# Altium PCB OneFader_Main.PcbDoc
Units mm, origin at the board's own origin, x right, y up, seen from the top; angles counter-clockwise.
Board outline 60 x 234 mm, 2 copper layers (Top Layer, Bottom Layer); 18 components, 42 nets, 93 pads, 8 vias.
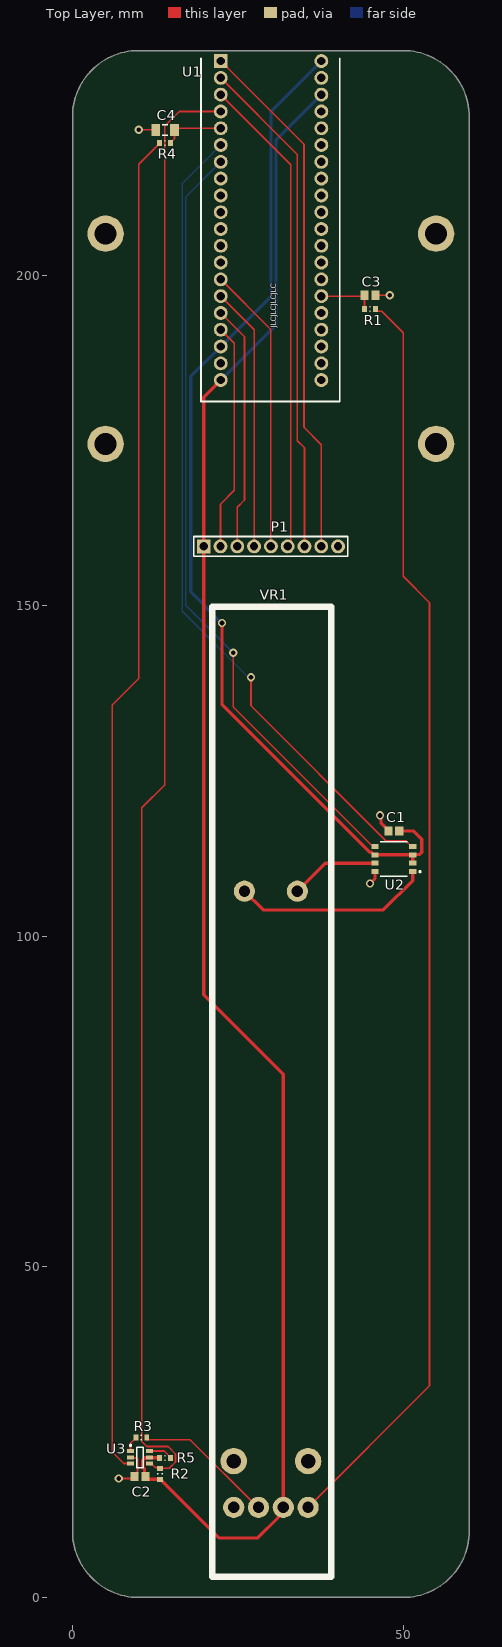
[diagram p0: Top Layer view]
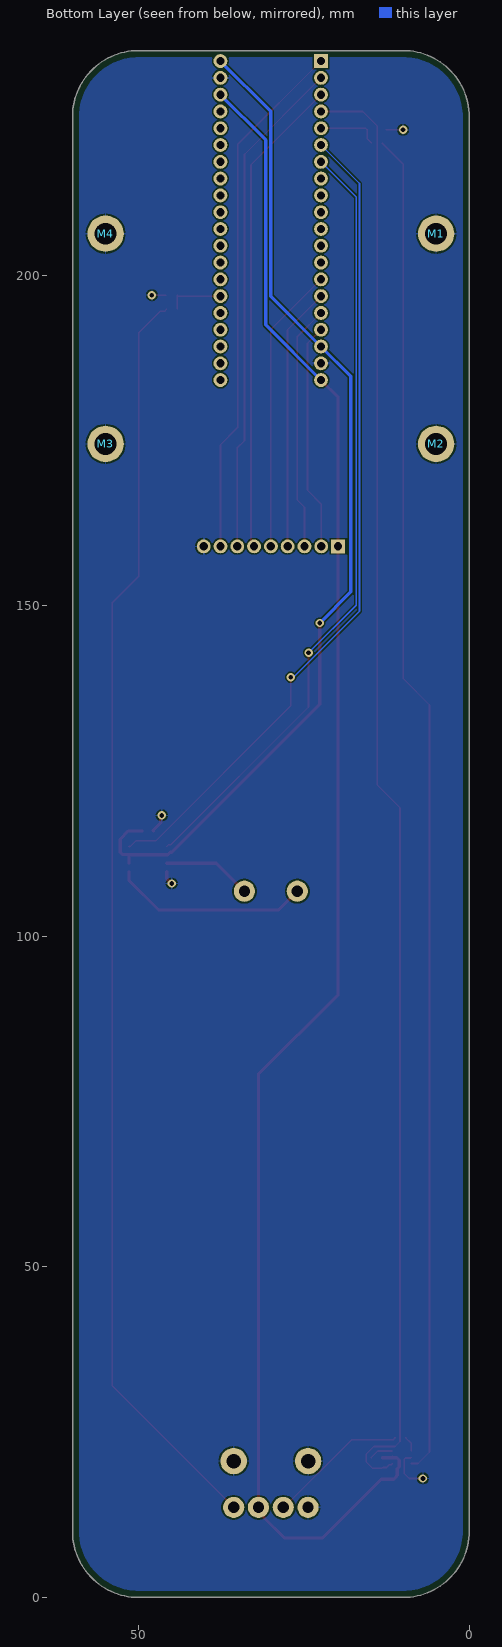
[diagram p1: Bottom Layer view, seen from below]

## Layer stack, top to bottom
Top Solder: solder mask 0.0102, Solder Resist, Dk 3.5
Top Layer: signal copper 0.0356
Dielectric 1: dielectric 0.32, FR-4, Dk 4.8
Bottom Layer: signal copper 0.0356
Bottom Solder: solder mask 0.0102, Solder Resist, Dk 3.5

## Board outline
10,0 50,0 ccw(c50,10) 60,10 60,224 ccw(c50,224) 50,234 10,234 ccw(c10,224) 0,224 0,10 ccw(c10,10)

## Design rules (kind name [scope] priority, off if disabled: settings)
BoardOutlineClearance [All] p1: gap=0.2 ignorepadtopadclearanceinfootprint=FALSE except(1: Fill-OutlineEdge Fill-CavityEdge Fill-CutoutEdge Fill-SplitBarrior Fill-SplitContinuation Poly-OutlineEdge Poly-CavityEdge Poly-CutoutEdge Poly-SplitBarrior Poly-SplitContinuation)
Clearance [All] p1: gap=0.254 ignorepadtopadclearanceinfootprint=FALSE except(0: Arc-Hole Track-Hole SMDPad-Hole THPad-Hole Via-Hole Fill-Hole Poly-Hole Region-Hole Text-Hole)
Height [All] p1: minheight=0 maxheight=50 prefheight=12.7
HoleSize [All] p1: absolutevalues=TRUE maxlimit=5 minlimit=0.025 maxpercent=80.000 minpercent=20.000
MinimumSolderMaskSliver [All] p1: minsoldermaskwidth=0.1
PolygonConnect [All] p1: connectstyle=Relief reliefconductorwidth=0.254 reliefentries=4 polygonreliefangle="90 Angle" airgapwidth=0.254
RoutingVias [All] p1: holewidth=0.711 width=1.27 viastyle="Through Hole" minholewidth=0.711 minwidth=1.27 maxholewidth=0.711 maxwidth=1.27
SolderMaskExpansion [All] p1: expansion=0.05 istentingtop=FALSE
Width [All] p1: maxlimit=0.5 minlimit=0.127 preferedwidth=0.254 minimp=50.000000 maximp=50.000000 favimp=50.000000
27 further rules are at their usual default settings.

## Components (designator, comment, footprint, x,y, rotation, side; value= is the part's Value field where it differs from the comment)
C1 "C_NP_0805_Generic" CAPC2012X14N 48.6,115.954 r0 top value=10u
C2 "C_NP_0805_Generic" CAPC2012X14N 10.2,18.3 r0 top value=100n
C3 "C_NP_0805_Generic" CAPC2012X14N 45,197 r180 top value=1u
C4 "C_NP_1206_Generic" CAPC3216X14N 14,222 r0 top value=10u
M1 "M3 Flat Screw" "M3 Screw" 5,206.3 r180 bottom
M2 "M3 Flat Screw" "M3 Screw" 5,174.5 r180 bottom
M3 "M3 Flat Screw" "M3 Screw" 55,174.5 r180 bottom
M4 "M3 Flat Screw" "M3 Screw" 55,206.3 r180 bottom
P1 "9 Header" "9 Header" 30,159 r90 top
R1 "R_0603_Generic" RESC1608X06N 45,194.9 r0 top value=10k
R2 "R_0603_Generic" RESC1608X06N 13.2,18.7 r270 top value=4k7
R3 "R_0603_Generic" RESC1608X06N 10.4,24.2 r180 top value=4k7
R4 "R_0603_Generic" RESC1608X06N 14,220 r180 top value=10k
R5 "R_0603_Generic" RESC1608X06N 14,21.1 r180 top value=10k
U1 "Blackpill" "BlackPill - WeAct" 30,209.4 r0 top
U2 "BD6221F-E2" SOP127P620X160-8N 48.6,111.7 r180 top
U3 "MTCH101-I/OT" SOT95P270X145-6N 10.2,21.2 r0 top
VR1 "RSA0N11M9A0J" RSA0N11M9A0J 30,76.5 r90 top

## Footprints (in the part's own frame and the unit in brackets; to place one, negate y for a bottom-side part, rotate by r counter-clockwise, add the part's x,y. Pads: shape width x height; smd on the part's side, far side on the other; paste and mask are expansions set on the pad)
"9 Header" [mm]
  rect 2.1x2.1 hole 1.25: 1(0,10.16)
  round 2.1 hole 1.25: 2(0,7.62) 3(0,5.08) 4(0,2.54) 5(0,0) 6(0,-2.54) 7(0,-5.08) 8(0,-7.62) 9(0,-10.16)
  silkscreen extent -1.5,-11.65 1.5,11.65, body extent -1.26,-11.42 1.28,11.44, height 6.54
"BlackPill - WeAct" [mm]
  rect 2.1x2.1 hole 1.25: 1(-7.581,23.01)
  round 2.1 hole 1.25: 2(-7.581,20.47) 3(-7.581,17.93) 4(-7.581,15.39) 5(-7.581,12.85) 6(-7.581,10.31) 7(-7.581,7.77) 8(-7.581,5.23) 9(-7.581,2.69) 10(-7.581,0.15) 11(-7.581,-2.39) 12(-7.581,-4.93) 13(-7.581,-7.47) 14(-7.581,-10.01) 15(-7.581,-12.55) 16(-7.581,-15.09) 17(-7.581,-17.63) 18(-7.581,-20.17) 19(-7.581,-22.71) 20(-7.581,-25.25) 21(7.634,-25.25) 22(7.634,-22.71) 23(7.634,-20.17) 24(7.634,-17.63) 25(7.634,-15.09) 26(7.634,-12.55) 27(7.634,-10.01) 28(7.634,-7.47) 29(7.634,-4.93) 30(7.634,-2.39) 31(7.634,0.15) 32(7.634,2.69) 33(7.634,5.23) 34(7.634,7.77) 35(7.634,10.31) 36(7.634,12.85) 37(7.634,15.39) 38(7.634,17.93) 39(7.634,20.47) 40(7.634,23.01)
  silkscreen extent -10.58,-28.49 10.42,23.4, body extent -10.45,-28.49 10.45,24.51, height 7.45
CAPC2012X14N [mm] "Chip Capacitor, 2-Leads, Body 2.00x1.25mm, IPC Medium Density"
  rect 1.25x1.4 smd: 1(-0.825,0) 2(0.825,0)
  body extent -1.05,-0.63 1.05,0.63, height 1.35
CAPC3216X14N [mm] "Chip Capacitor, 2-Leads, Body 3.20x1.60mm, IPC Medium Density"
  rect 1.3x1.8 smd: 1(-1.425,0) 2(1.425,0)
  silkscreen extent -0.4,-0.8 0.4,0.8, body extent -1.68,-0.87 1.67,0.87, height 1.35
"M3 Screw" [mm]
  round 5.5 hole 3.3: 1(0,0)
  body extent -2.8,-2.8 2.8,2.8, height 2.37
RESC1608X06N [mm] "Chip Resistor, 2-Leads, Body 1.60x0.80mm, IPC Medium Density"
  rect 0.75x0.9 smd: 1(-0.825,0) 2(0.825,0)
  silkscreen extent -0.05,-0.35 0.05,0.35, body extent -0.8,-0.4 0.8,0.4, height 0.4
RSA0N11M9A0J [mm]
  round 3.2 hole 1.7: 1(-62.869,5.622) 2(-62.869,-5.628) 3(-62.869,-1.878) A(30.331,3.997) B(30.331,-4.003) T(-62.869,1.872)
  round 4 hole 2.2: L1(-55.869,5.622) L2(-55.869,-5.628)
  silkscreen extent -73.37,-9.13 73.38,8.87, body extent -73.31,-9.07 73.26,8.93, height 34.2
SOP127P620X160-8N [mm] "SOP, 8-Leads, Body 5.2x4.6mm, Pitch 1.27mm"
  rect 1.1x0.76 smd: 1(-2.85,1.905) 2(-2.85,0.635) 3(-2.85,-0.635) 4(-2.85,-1.905) 5(2.85,-1.905) 6(2.85,-0.635) 7(2.85,0.635) 8(2.85,1.905)
  silkscreen extent -4.08,-2.6 2.05,2.6, body extent -3.02,-2.46 2.98,2.44, height 1.7
SOT95P270X145-6N [mm] "SOT23, 6-Leads, Body 2,90x2,70mm, Pitch 0,95mm, IPC Medium Density"
  rect 1.05x0.6 smd: 1(-1.425,0.95) 2(-1.425,0) 3(-1.425,-0.95) 4(1.425,-0.95) 5(1.425,0) 6(1.425,0.95)
  silkscreen extent -1.55,-1.55 0.5,1.92, body extent -1.21,-1.37 1.21,1.42, height 1.09

## Part data
C1 C2 C3: library part C0-STD-0008-2, "Generic 0805 Non Polarized Capacitor", Manufacturer=Generic, Package=0805, Category=Passive, Sub-Category=C
C4: library part C0-STD-0009-3, "Generic 1206 Non Polarized Capacitor", Manufacturer=Generic, Package=1206, Category=Passive, Sub-Category=C
R1 R2 R3 R4 R5: library part C0-STD-0006-8, "Generic 0603 Resistor", Manufacturer=Generic, Package=0603, Category=Passive, Sub-Category=R
U1: library part "Black Pill - We Act"
U2: "DC Brush Motor Driver, 6 to 18 V, 1 A, -40 to 85 degC, 8-Pin SOP, RoHS, Tape and Reel", Manufacturer="ROHM Semiconductor", Output Current="1 A Max.", Supply Voltage="6 to 15 V", Temperature Range="-40 to 85 degC", ComponentLink1Description="Manufacturer URL", ComponentLink1URL=http://www.rohm.com/web/global/, ComponentLink2Description=Datasheet, ComponentLink2URL=http://rohmfs.rohm.com/en/products/databook/datasheet/ic/motor/dc/bd622x-e.pdf, ComponentLink3Description="Package Specification", ComponentLink3URL=http://rohmfs.rohm.com/en/products/databook/package/spec/ic/sop-1-2-e.pdf, DatasheetVersion="Rev. 003", Mounting Technology="Surface Mount", PackageDescription="8-Pin Small Outline Package, Body 5 x 4.4 mm, Pitch 1.27 mm", PackageVersion="Rev. A", Packing="Tape and Reel", PartNumber=BD6221F-E2, RoHS=TRUE, RON@IOUT="0.5 A=1.5 Ohm Typ."
U3: "Single Channel Proximity Detector 6-Pin SOT-23 T/R"
VR1: "Motorized 10k Linear Fader"

## Via types
v1: diameter 1.27, hole 0.711, Top Layer to Bottom Layer, 8 vias

## Nets (pads, with @x,y where several pads share a name; then routed paths per layer and width w, separated by ;. In a path a pad name is that pad's centre, name@x,y a point inside that pad or via, vN(x,y) a via of type N, cw(c..) or ccw(c..) an arc to the next point about the centre after c; other vN are vias at no path point)
3V3: C2.2 P1.1 R2.2 R5.2 U1.20 U1.38 U3.5 VR1.3 | length 258.6
  Top Layer w0.5: R5.2 13.125,21.15 11.675,21.15 U3.5 11.575,21.15 10.987,21.15 10.596,20.759 10.596,19.741 10.88,19.457 10.88,18.445 C2.2 11.025,18.25 11.4,17.875 R2.2 13.275,17.875 22.15,9 28,9 31.093,12.093 31.093,12.115 31.878,12.901 VR1.3 31.878,79.155 19.84,91.193 19.84,181.571 U1.20
  Bottom Layer w0.5: U1.20 30.78,192.511 30.78,220.476 U1.38
+5: C1.2 U1.18 U1.40 U2.2 U2.3 U2.6 | length 154.7
  Top Layer w0.5: U1.18 U1.18@22.77,189.23 ; v1(22.6,147.4) 22.6,135.112 44.991,112.721 45.194,112.721 45.58,112.335 U2.6 U2.3 ; C1.2 51.546,115.954 52.8,114.7 52.8,112.7 52.5,112.4 51.515,112.4 U2.3 ; U2.2 U2.3 ; U2.3@51.467,112.318 U2.3
  Bottom Layer w0.5: v1(22.6,147.4) 17.9,152.1 17.9,184.711 U1.18 30.026,196.837 30.026,224.802 U1.40
A: U2.1 VR1.A | length 29.8
  Top Layer w0.5: VR1.A 28.834,104 47,104 51.45,108.45 U2.1
A1: U1.27
A2: U1.28
A3: U1.29
A4: U1.30
A5: U1.31
A6: U1.32
A7: U1.33
A11: U1.8
A12: U1.9
A13: U1.10
B: U2.7 VR1.B | length 13.5
  Top Layer w0.5: VR1.B 38.237,111.065 U2.7
B0: U1.34
B1: U1.35
B2: U1.36
B3: U1.11
B4: U1.12
B5: U1.13
B10: U1.37
BTN1: P1.6 U1.3 | length 72.9
  Top Layer w0.254: U1.3 33,216.749 33,159.893 32.54,159.433 P1.6
BTN2: P1.2 U1.17 | length 34.5
  Top Layer w0.254: P1.2 22.38,165.38 24.473,167.473 24.473,189.716 U1.17
BTN3: P1.3 U1.16 | length 37.2
  Top Layer w0.254: U1.16 26,190.729 26,166 24.92,164.92 P1.3
BTN4: P1.7 U1.2 | length 76.1
  Top Layer w0.254: U1.2 34,218.289 34,175 35.08,173.92 P1.7
BTN5: P1.8 U1.1 | length 79.7
  Top Layer w0.254: U1.1 35,219.829 35,177 37.62,174.38 P1.8
C13: U1.22
C14: U1.23
C15: U1.24
FIN: U1.6 U2.4 | length 125.1
  Top Layer w0.254: v1(27,139.2) 27,134.865 47.388,114.477 50.408,114.477 51.28,113.605 U2.4
  Bottom Layer w0.254: U1.6 16.592,213.883 16.592,149.18 26.377,139.394 26.806,139.394 v1(27,139.2)
GND: C1.1 C2.1 C3.1 C4.1 M1.1 M2.1 M3.1 M4.1 P1.9 U1.19 U1.39 U2.8 U3.2 VR1.1 VR1.L1 VR1.L2 | length 16.3
  Top Layer w0.254: v1(7,18) 9.075,18 9.811,18.736 9.811,19.923 9.824,19.935 9.824,20.953 9.675,21.101 8.874,21.101 U3.2 ; v1(10,222) C4.1 ; C3.1 v1(48,197)
  Top Layer w0.5: v1(45,108) 45.75,108.75 U2.8 ; v1(46.5,118.3) 46.647,118.153 46.647,117.156 47.775,116.029 C1.1 C1.1@47.752,115.977
NetR1_2: R1.2 VR1.2 | length 192.7
  Top Layer w0.254: VR1.2 54,32.003 54,150.488 50,154.488 50,191.325 46.748,194.577 46.073,194.577 45.825,194.825 R1.2
NetR3_2: R3.2 U3.1 | length 2.4
  Top Layer w0.254: U3.1 8.775,23.325 9.575,24.125 R3.2
NetR4_2: R4.2 U3.3 | length 204.4
  Top Layer w0.254: U3.3@8.757,20.268 7.732,20.268 6,22 6,135 10,139 10,216.825 R4.2
NetR5_1: R5.1 U3.6 | length 3.7
  Top Layer w0.254: U3.6 13.85,22.15 14.825,21.175 R5.1
POT: C3.2 R1.1 U1.26 | length 8.7
  Top Layer w0.254: U1.26 44.025,196.85 C3.2 R1.1
RIN: U1.7 U2.5 | length 117.8
  Top Layer w0.254: v1(24.3,142.909) 24.3,134.7 45.142,113.858 45.497,113.858 U2.5
  Bottom Layer w0.254: U1.7 17.1,211.851 17.1,150.109 v1(24.3,142.909)
SCL: P1.5 U1.14 | length 43.5
  Top Layer w0.254: U1.14 30,191.809 P1.5
SDA: P1.4 U1.15 | length 40
  Top Layer w0.254: U1.15 27.496,191.773 27.496,159.036 P1.4
SENS: C4.2 R4.1 U1.5 | length 9.3
  Top Layer w0.254: R4.1 14.825,220.075 15.425,220.675 C4.2 15.675,222.25 U1.5
T: R3.1 VR1.T | length 21.3
  Top Layer w0.254: R3.1 11.225,24.125 11.473,23.877 17.765,23.877 28.011,13.631 VR1.T
TOUCH: R2.1 U1.4 U3.4 | length 221.6
  Top Layer w0.254: U3.4 11.798,20.077 12.086,20.077 12.518,19.645 13.08,19.645 R2.1 13.207,19.532 14.621,19.532 15.581,20.492 15.581,21.708 14.458,22.831 11.23,22.831 10.469,23.592 10.469,119.438 13.931,122.9 13.931,222.595 16.126,224.79 U1.4
pads on no net: U1.21 U1.25

## Polygon pours and split planes (outlines as drawn)
GND on Bottom Layer "NONET_L-01_P-001" (solid, pour order 0): 0,234 60,234 60,0 0,0

## Silkscreen, mask and mechanical layers (free items; w line width, h text height)
Top Overlay:
  text "JLCJLCJLCJLC" at 30.8,192.043 h0.85 r90
Board Outline:
  the board outline again, w0.254